# EAGLE board BMS_watchdog (EAGLE 7.7.0)
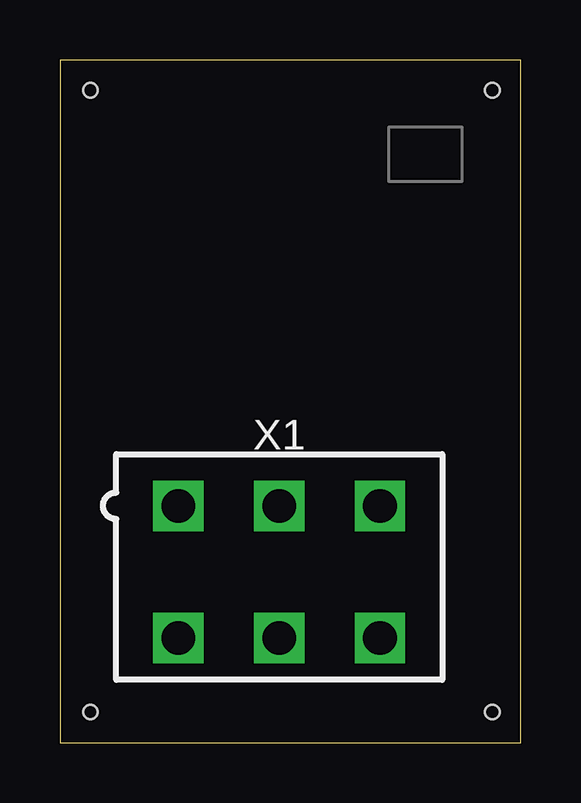
[diagram p0: board, top side]
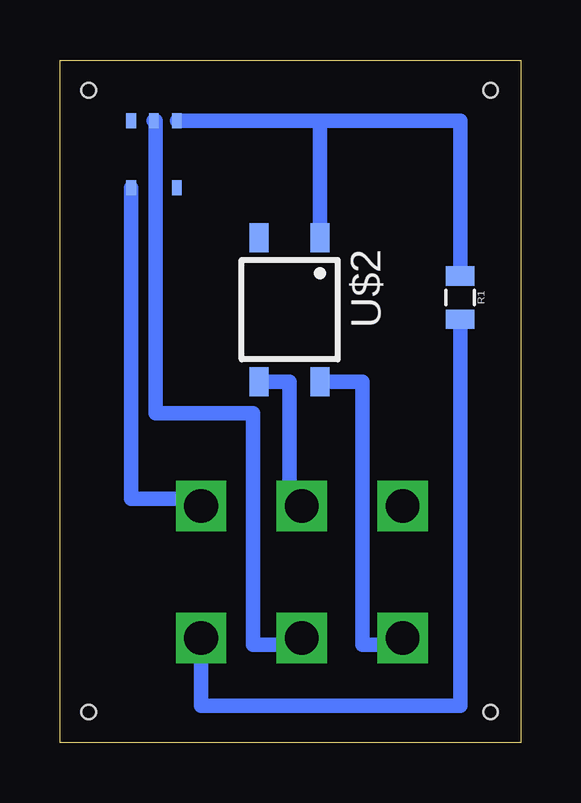
[diagram p1: board, bottom side, seen from below]

Size 19.23 x 28.44 mm. Coordinates in mm from the lower left corner, seen from the top.
Outline: 0,0 19.23,0 19.23,28.44 0,28.44 0,0
Copper layers (1*16): Top 0.035mm / dielectric 1.5mm / Bottom 0.035mm
Design rules "default": minimum track width 10mil, minimum drill 24mil, track to track 8mil, track to pad 8mil, pad to pad 8mil, via to via 8mil, smd to smd 8mil, copper to edge 40mil, drill to drill 8mil, minimum pad ring 10mil, minimum via ring 8mil, stop-mask expansion 4mil, vias tented up to drill 0mil, thermal gap 10mil
Holes 0.6 mm at 1.27,27.18 18.03,27.18 18.03,1.27 1.27,1.27

## Footprints (pad centres in the part's own frame; a part is rotated, then mirrored left to right if it is on the bottom)
0805 = smd 0.8 x 1.2: 1 -0.9,0; 2 0.9,0
SOT23-5 = smd 0.61 x 0.406: EN -2.794,0; GND -2.794,0.94; VCC 0,1.905; WDI 0,0; WDO -2.794,1.905
SOP04 = smd 0.8 x 1.2: 1 -1.27,-3; 2 1.27,-3; 3 1.27,3; 4 -1.27,3
MINIFIT_5566-6 = drill 1.4 square: 1 4.2,-2.75; 2 0,-2.75; 3 -4.2,-2.75; 4 4.2,2.75; 5 0,2.75; 6 -4.2,2.75

## Placement (x,y rotation side)
R1  210  [0805]  2.54,18.54 270 bottom
U$1  STWD100  [SOT23-5]  16.26,23.11 270 bottom
U$2  CPC1002N  [SOP04]  9.65,18.03 180 bottom
X1  MINIFIT_5566-6  [MINIFIT_5566-6]  9.14,7.11 180 top

## Library data of the parts
R1 U$1 U$2 = HyTechDevices
X1 = HyTechDevices; MPN: 95566-61002; OC_FARNELL: unknown; OC_NEWARK: 22K8620

## Nets
GND: U$1.GND X1.5
N$1: R1.2 X1.6
N$2: U$1.WDI X1.3
N$3: R1.1 U$1.WDO U$2.1
N$4: U$2.4 X1.4
N$5: U$2.3 X1.2
N$6: U$2.2

## Tracks (layer width: path | path; a pad name or v marks a point on that pad's centre or on a via)
GND
  Bottom 0.61: U$1.GND 15.24,25.91 15.24,13.72 11.18,13.72 11.18,4.06 9.14,4.06 X1.5
N$1
  Bottom 0.61: R1.2 2.54,1.52 13.34,1.52 X1.6
N$2
  Bottom 0.61: U$1.WDI 16.26,10.16 13.34,10.16 X1.3
N$3
  Bottom 0.61: R1.1 2.54,25.91 8.38,25.91 | 8.38,25.91 U$1.WDO | U$2.1 8.38,25.91
N$4
  Bottom 0.61: U$2.4 6.6,15.03 6.6,4.06 4.94,4.06 X1.4
N$5
  Bottom 0.61: U$2.3 9.65,15.03 9.65,10.16 9.14,10.16 X1.2